# Altium PCB Vesa-Esp.PcbDoc
Units mm, origin at the board's own origin, x right, y up, seen from the top; angles counter-clockwise.
Board outline 120.35 x 116.57 mm, 2 copper layers (Top Layer, Bottom Layer); 81 components, 70 nets, 292 pads, 286 vias.
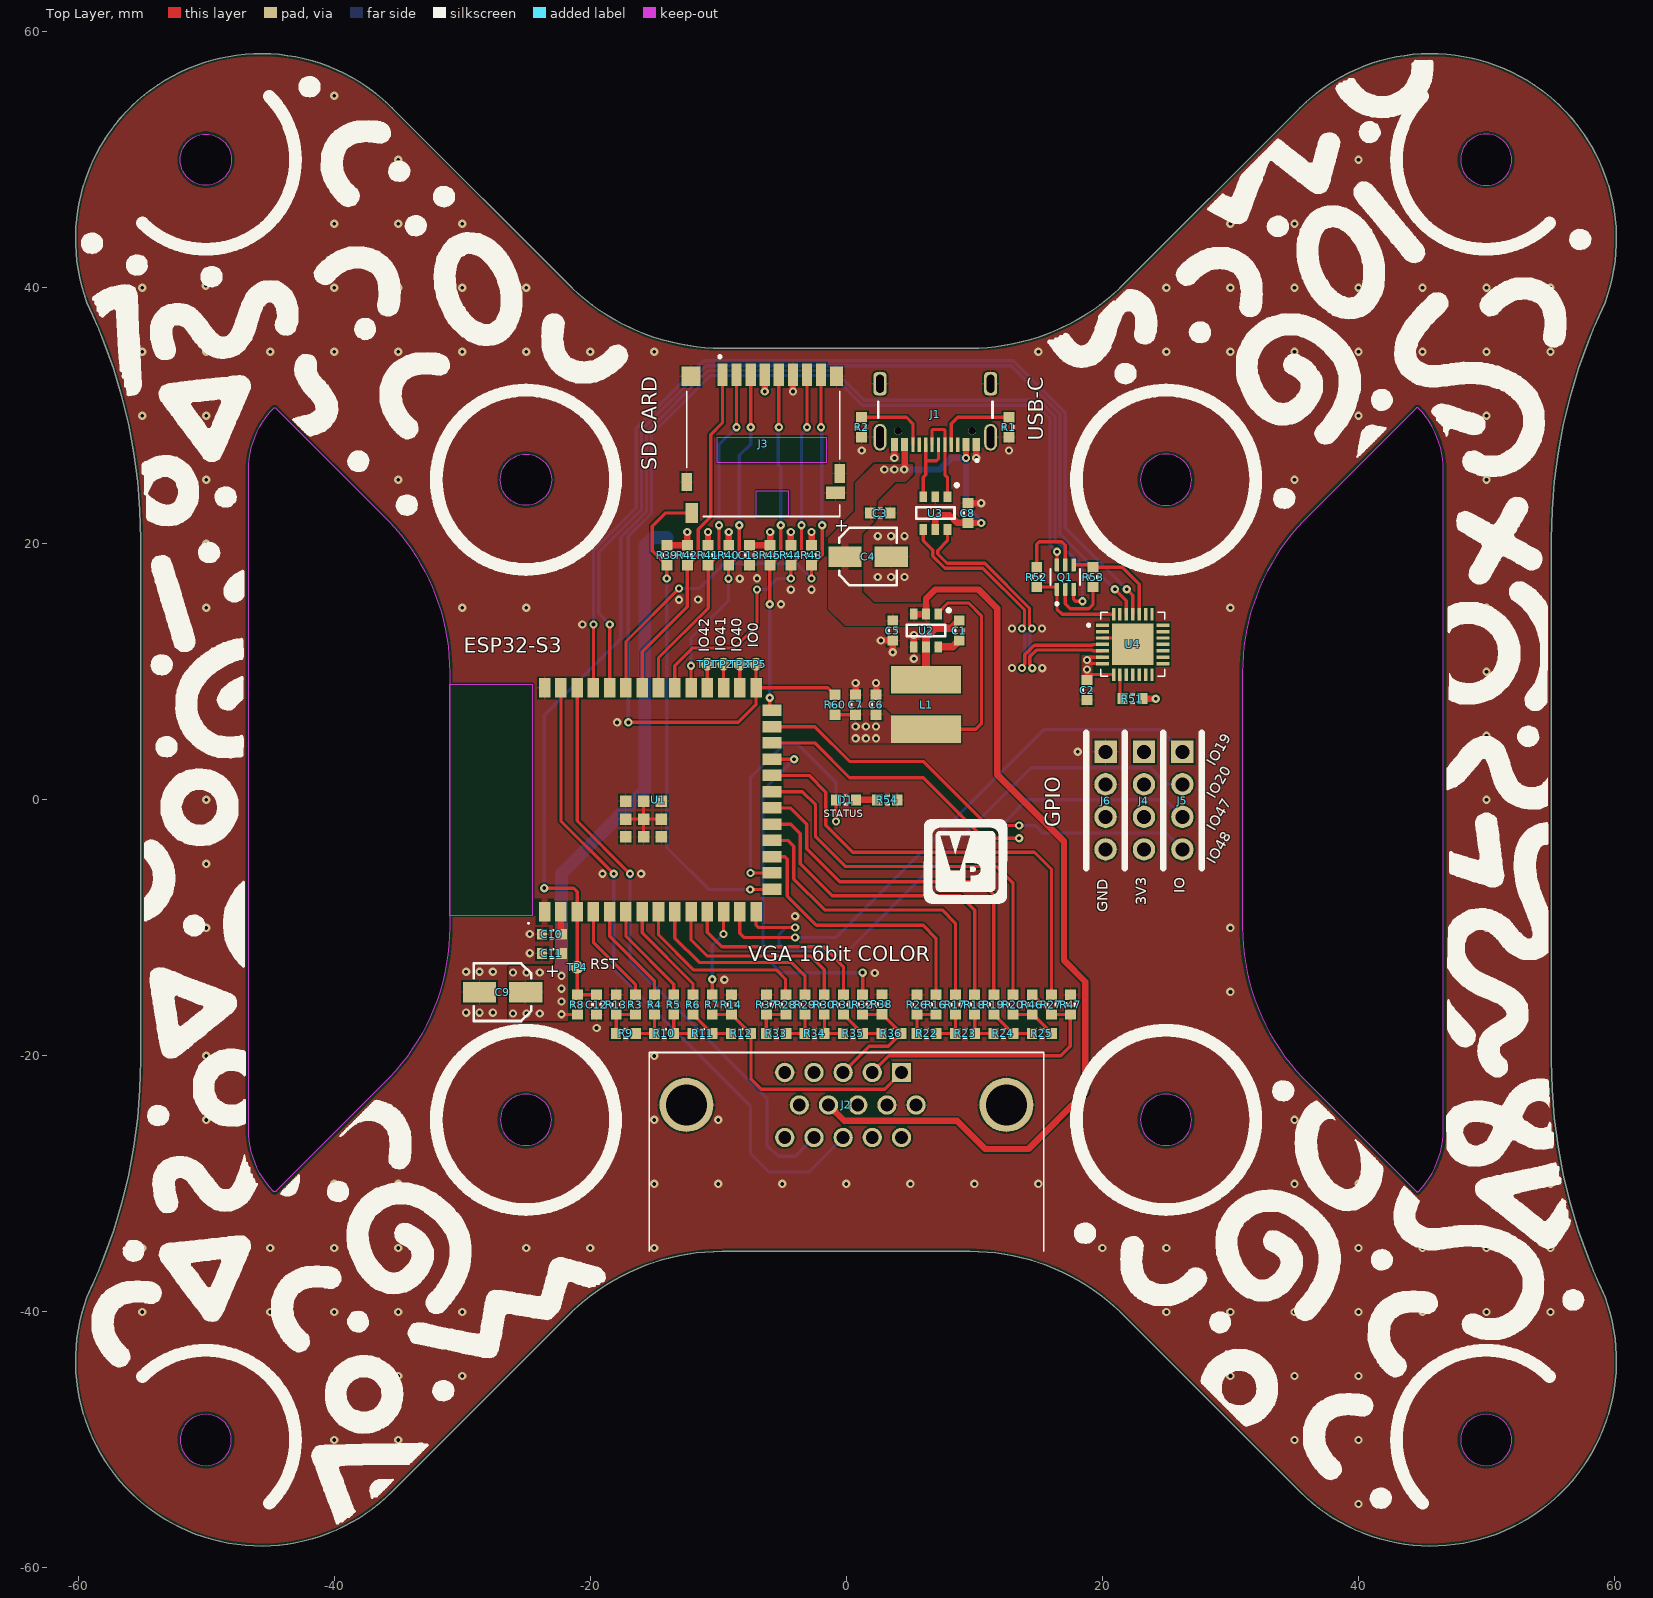
[diagram p0: Top Layer view]
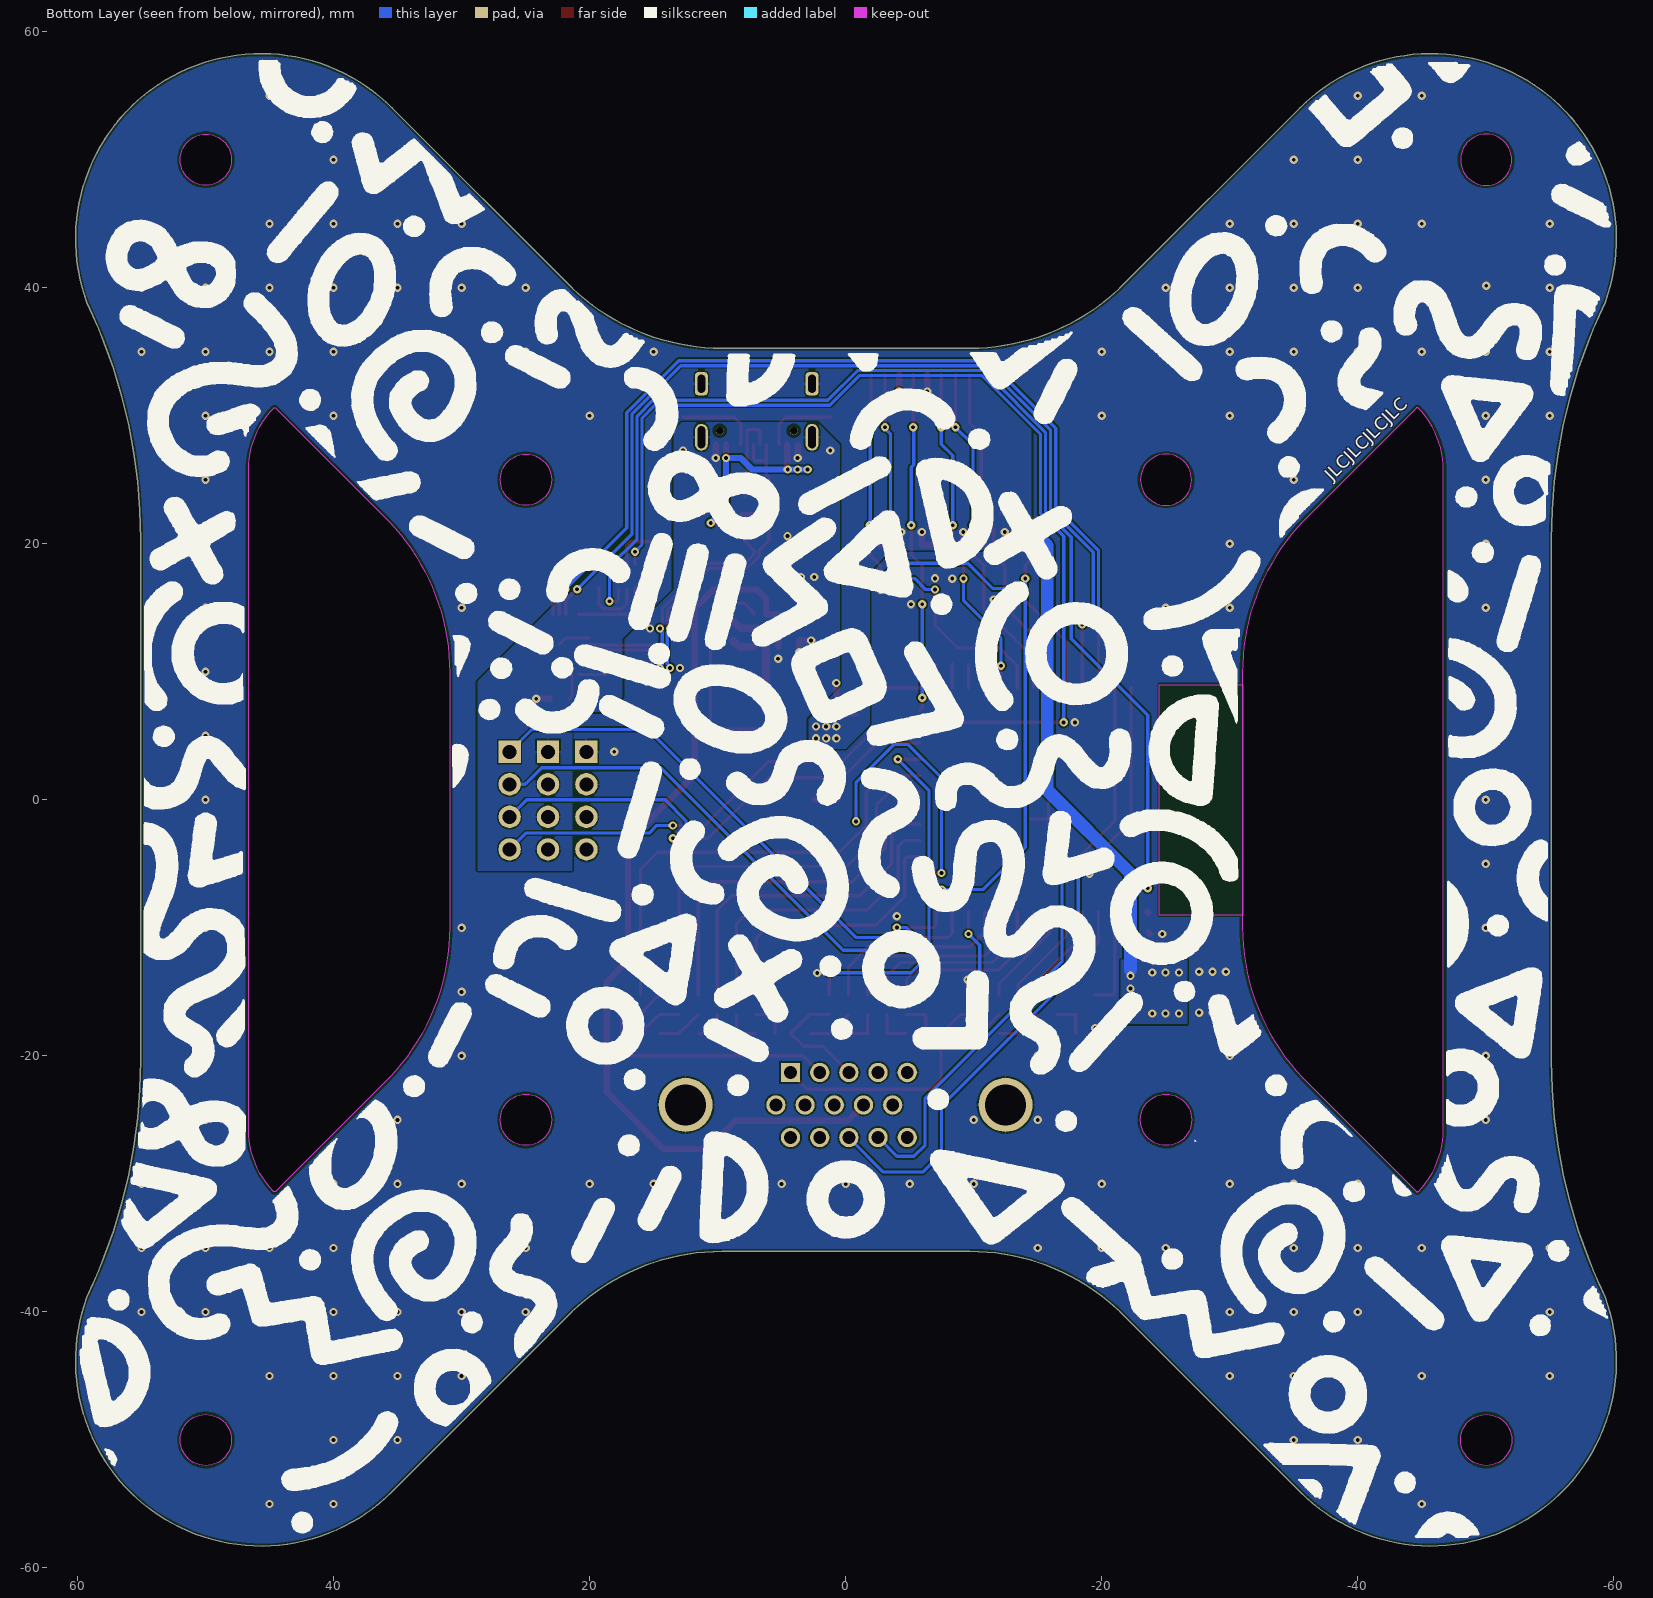
[diagram p1: Bottom Layer view, seen from below]

## Layer stack, top to bottom
Top Solder: solder mask 0.0102, Solder Resist, Dk 3.5
Top Layer: signal copper 0.0356
Dielectric 1: dielectric 0.32, FR-4, Dk 4.8
Bottom Layer: signal copper 0.0356
Bottom Solder: solder mask 0.0102, Solder Resist, Dk 3.5

## Board outline
-59.328,-38.855 ccw(c-97.864,-20.365) -55.122,-20.365 -55.122,20.365 ccw(c-97.864,20.365) -59.328,38.855 cw(c-45.722,43.807) -35.484,54.045 -21.415,39.975 ccw(c-9.694,52.229) -9.694,35.272 9.644,35.272 ccw(c9.644,52.229) 21.365,39.975 35.434,54.045 cw(c45.672,43.807) 59.278,38.855 ccw(c97.814,20.365) 55.072,20.365 55.072,-20.365 ccw(c97.814,-20.365) 59.278,-38.855 cw(c45.672,-43.807) 35.434,-54.045 21.365,-39.975 ccw(c9.644,-52.229) 9.644,-35.272 -9.694,-35.272 ccw(c-9.694,-52.229) -21.415,-39.975 -35.484,-54.045 cw(c-45.722,-43.807)
cut-out: 44.692,-30.588 ccw(c44.183,-30.099) 44.694,-30.586 ccw(c39.623,-25.739) 46.638,-25.739 46.638,25.739 ccw(c39.623,25.739) 44.692,30.588 ccw(c44.6,30.5) 44.501,30.58 35.678,21.757 ccw(c35.759,21.674) 35.675,21.754 ccw(c48.076,9.923) 30.937,9.923 30.937,-9.929 ccw(c31.06,-9.929) 30.937,-9.936 ccw(c48.076,-9.907) 35.647,-21.709 ccw(c35.767,-21.666) 35.678,-21.757 44.501,-30.58 ccw(c44.6,-30.5) 44.691,-30.589 ccw(c44.61,-30.51)
cut-out: -44.742,-30.588 cw(c-44.233,-30.099) -44.744,-30.586 cw(c-39.673,-25.739) -46.688,-25.739 -46.687,25.739 cw(c-39.673,25.739) -44.742,30.588 cw(c-44.65,30.5) -44.551,30.58 -35.727,21.757 cw(c-35.809,21.674) -35.725,21.754 cw(c-48.126,9.923) -30.987,9.923 -30.987,-9.929 cw(c-31.11,-9.929) -30.987,-9.936 cw(c-48.126,-9.907) -35.697,-21.709 cw(c-35.817,-21.666) -35.728,-21.757 -44.551,-30.58 cw(c-44.65,-30.5) -44.741,-30.589 cw(c-44.66,-30.51)
cut-out: -50.025,48 cw(c-50.025,50) -52.025,50 cw(c-50.025,50) -50.025,52 cw(c-50.025,50) -48.025,50 cw(c-50.025,50)
cut-out: -25.025,23 cw(c-25.025,25) -27.025,25 cw(c-25.025,25) -25.025,27 cw(c-25.025,25) -23.025,25 cw(c-25.025,25)
cut-out: 47.975,50 ccw(c49.975,50) 49.975,48 ccw(c49.975,50) 51.975,50 ccw(c49.975,50) 49.975,52 ccw(c49.975,50)
cut-out: 22.975,25 ccw(c24.975,25) 24.975,23 ccw(c24.975,25) 26.975,25 ccw(c24.975,25) 24.975,27 ccw(c24.975,25)
cut-out: 47.975,-50 ccw(c49.975,-50) 49.975,-52 ccw(c49.975,-50) 51.975,-50 ccw(c49.975,-50) 49.975,-48 ccw(c49.975,-50)
cut-out: 22.975,-25 ccw(c24.975,-25) 24.975,-27 ccw(c24.975,-25) 26.975,-25 ccw(c24.975,-25) 24.975,-23 ccw(c24.975,-25)
cut-out: -27.025,-25 ccw(c-25.025,-25) -25.025,-27 ccw(c-25.025,-25) -23.025,-25 ccw(c-25.025,-25) -25.025,-23 ccw(c-25.025,-25)
cut-out: -52.025,-50 ccw(c-50.025,-50) -50.025,-52 ccw(c-50.025,-50) -48.025,-50 ccw(c-50.025,-50) -50.025,-48 ccw(c-50.025,-50)

## Design rules (kind name [scope] priority, off if disabled: settings)
BoardOutlineClearance [All] p1: gap=0.2 ignorepadtopadclearanceinfootprint=FALSE
Clearance [All] p1: gap=0.127 ignorepadtopadclearanceinfootprint=TRUE except(0.254: Arc-Hole Track-Hole SMDPad-Hole THPad-Hole Via-Hole Fill-Hole Poly-Hole Region-Hole Text-Hole)
ComponentClearance [All] p1: gap=0.127 collisioncheckmode=3 verticalgap=0.127 showdistances=TRUE
DiffPairsRouting [All] p1: maxlimit=0.254 minlimit=0.127 mostfreqgap=0.127 toplayer_minwidth=0.127 toplayer_maxwidth=25.4 toplayer_prefwidth=0.127 bottomlayer_minwidth=0.127 bottomlayer_maxwidth=25.4 bottomlayer_prefwidth=0.127 maxuncoupledlength=12.7
Height [All] p1: minheight=0 maxheight=1816.048 prefheight=12.7
HoleSize [All] p1: absolutevalues=TRUE maxlimit=6.3 minlimit=0.3 maxpercent=80.000 minpercent=20.000
HoleToHoleClearance [All] p1: gap=0.254 allowstackedmicrovias=FALSE
MinimumAnnularRing [All] p1: minimumring=0.152
MinimumSolderMaskSliver [All] p1: minsoldermaskwidth=0.152
PlaneClearance [All] p1: clearance=0.127
PlaneConnect PlaneConnectPowerPads [InPadClass('PowerPads')] p1: planeconnectstyle=Direct reliefexpansion=0.508 reliefentries=4 reliefconductorwidth=0.254 reliefairgap=0.254
PlaneConnect [All] p2: planeconnectstyle=Relief reliefexpansion=0.3 reliefentries=4 reliefconductorwidth=0.508 reliefairgap=0.254
PolygonConnect PolygonConnectPowerPads [All vs (InPadClass('PowerPads'))] p1: connectstyle=Direct reliefconductorwidth=0.254 reliefentries=4 polygonreliefangle="90 Angle" airgapwidth=0.254
PolygonConnect [All] p2: thpad.connectstyle=Relief thpad.reliefconductorwidth=0.127 thpad.reliefentries=4 thpad.polygonreliefangle="90 Angle" thpad.airgapwidth=0.127 smdpad.connectstyle=Relief smdpad.reliefconductorwidth=0.127 smdpad.reliefentries=4 smdpad.polygonreliefangle="90 Angle" smdpad.airgapwidth=0.127 via.connectstyle=Direct via.reliefconductorwidth=0.127 via.reliefentries=4 via.polygonreliefangle="90 Angle" via.airgapwidth=0.127
RoutingVias [All] p1: holewidth=0.3 width=0.6 viastyle="Through Hole" minholewidth=0.3 minwidth=0.6 maxholewidth=0.6 maxwidth=6.6
SilkToSilkClearance [All] p1: silktosilkclearance=0.127
SilkToSolderMaskClearance [IsPad] p1: minsilkscreentomaskgap=0.127 clearancetoexposedcopper=TRUE
SolderMaskExpansion [All] p1: expansion=0.051 istentingtop=FALSE
UnRoutedNet [All] p1: checkbadconnections=TRUE
Width Width_10mil [All] p1: maxlimit=25.4 minlimit=0.254 preferedwidth=0.254 minimp=50.000000 maximp=50.000000 favimp=50.000000
Width Width_6mil [All] p2: maxlimit=25.4 minlimit=0.152 preferedwidth=0.152 minimp=50.000000 maximp=50.000000 favimp=50.000000
Width Power_20mil [All] p3: maxlimit=25.4 minlimit=0.508 preferedwidth=0.508 minimp=50.000000 maximp=50.000000 favimp=50.000000
Width Power_12mil [All] p4: maxlimit=25.4 minlimit=0.305 preferedwidth=0.305 minimp=50.000000 maximp=50.000000 favimp=50.000000
Width Width_5mil [All] p5: maxlimit=25.4 minlimit=0.127 preferedwidth=0.127 minimp=50.000000 maximp=50.000000 favimp=50.000000
19 further rules are at their usual default settings.

## Classes and differential pairs
net class SD: SD_CLK SD_CMD SD_DAT0 SD_DAT1 SD_DAT2 SD_DAT3
differential pair USB_D: +USB_D_P -USB_D_N
differential pair ESP_USB_D: +ESP_USB_D_P -ESP_USB_D_N

## Components (designator, comment, footprint, x,y, rotation, side; value= is the part's Value field where it differs from the comment)
C1 "100nF 50V" CAPC1608X06N 8.825,13.225 r270 top
C2 "22uF 6V3" CAPC1608X06N 18.8,8.575 r90 top
C3 "100nF 50V" CAPC1608X06N 2.65,22.4 r180 top
C4 "47uF 20V" 865080342006 1.7,19 r180 top
C5 "22uF 6V3" CAPC1608X06N 3.625,13.225 r90 top
C6 "22uF 6V3" CAPC1608X06N 2.325,7.425 r270 top
C7 "22uF 6V3" CAPC1608X06N 0.725,7.425 r270 top
C8 "100nF 50V" CAPC1608X06N 9.5,22.4 r270 top
C9 "47uF 20V" 865080342006 -26.85,-15.025 r0 top
C10 "22uF 6V3" CAPC1608X06N -23,-10.5 r0 top
C11 "100nF 50V" CAPC1608X06N -23,-12 r0 top
C12 "100nF 50V" CAPC1608X06N -19.5,-16 r90 top
C13 "100nF 50V" CAPC1608X06N -7.566,19.1 r90 top
D1 "QBLP601-IW" LEDC1608X06N -0.025,0 r0 top
J1 "USB4105-GF-A" USB4105-GF-A 6.95,32.5 r180 top
J2 "ICD15S13E4GX00LF" ICD15S13E4GX00LF 0.005,-23.835 r0 top
J3 "DM3D-SF" DM3D-SF -6.498,28.253 r180 top
J4 "Conn_2.54mm_4POS" CONN_2.54MM_4POS 23.25,3.75 r270 top
J5 "Conn_2.54mm_4POS" CONN_2.54MM_4POS 26.25,3.75 r270 top
J6 "Conn_2.54mm_4POS" CONN_2.54MM_4POS 20.25,3.75 r270 top
L1 "3.9uH/3.6A" SDE0604A-3R9M 6.225,7.425 r270 top
Q1 "BC847BS-7-F" SOT65P210X110-6N 17.1,17.4 r90 top
R1 "5K1 1%" RESC1608X06N 12.7,29.1 r90 top
R2 "5K1 1%" RESC1608X06N 1.2,29.1 r90 top
R3 "300R 1%" RESC1608X06N -16.475,-16 r270 top
R4 "300R 1%" RESC1608X06N -14.975,-16 r270 top
R5 "300R 1%" RESC1608X06N -13.475,-16 r270 top
R6 "300R 1%" RESC1608X06N -11.975,-16 r270 top
R7 "300R 1%" RESC1608X06N -10.475,-16 r270 top
R8 "10K 1%" RESC1608X06N -21,-16 r90 top
R9 "150R 1%" RESC1608X06N -17.225,-18.25 r0 top
R10 "150R 1%" RESC1608X06N -14.225,-18.25 r0 top
R11 "150R 1%" RESC1608X06N -11.225,-18.25 r0 top
R12 "150R 1%" RESC1608X06N -8.225,-18.25 r0 top
R13 "300R 1%" RESC1608X06N -17.975,-16 r270 top
R14 "150R 1%" RESC1608X06N -8.975,-16 r90 top
R16 "300R 1%" RESC1608X06N 7,-16 r270 top
R17 "300R 1%" RESC1608X06N 8.525,-16 r270 top
R18 "300R 1%" RESC1608X06N 10.025,-16 r270 top
R19 "300R 1%" RESC1608X06N 11.525,-16 r270 top
R20 "300R 1%" RESC1608X06N 13.025,-16 r270 top
R22 "150R 1%" RESC1608X06N 6.275,-18.25 r0 top
R23 "150R 1%" RESC1608X06N 9.275,-18.25 r0 top
R24 "150R 1%" RESC1608X06N 12.275,-18.25 r0 top
R25 "150R 1%" RESC1608X06N 15.275,-18.25 r0 top
R26 "300R 1%" RESC1608X06N 5.525,-16 r270 top
R27 "300R 1%" RESC1608X06N 16.025,-16 r270 top
R28 "300R 1%" RESC1608X06N -4.725,-16 r270 top
R29 "300R 1%" RESC1608X06N -3.225,-16 r270 top
R30 "300R 1%" RESC1608X06N -1.725,-16 r270 top
R31 "300R 1%" RESC1608X06N -0.225,-16 r270 top
R32 "300R 1%" RESC1608X06N 1.275,-16 r270 top
R33 "150R 1%" RESC1608X06N -5.475,-18.25 r0 top
R34 "150R 1%" RESC1608X06N -2.475,-18.25 r0 top
R35 "150R 1%" RESC1608X06N 0.525,-18.25 r0 top
R36 "150R 1%" RESC1608X06N 3.525,-18.25 r0 top
R37 "300R 1%" RESC1608X06N -6.225,-16 r270 top
R38 "150R 1%" RESC1608X06N 2.775,-15.975 r90 top
R39 "10K 1%" RESC1608X06N -14,19.1 r270 top
R40 "10K 1%" RESC1608X06N -9.184,19.1 r270 top
R41 "10K 1%" RESC1608X06N -10.802,19.1 r270 top
R42 "10K 1%" RESC1608X06N -12.419,19.1 r270 top
R43 "10K 1%" RESC1608X06N -2.713,19.1 r270 top
R44 "10K 1%" RESC1608X06N -4.331,19.1 r270 top
R45 "10K 1%" RESC1608X06N -5.949,19.1 r270 top
R46 "150R 1%" RESC1608X06N 14.525,-16 r90 top
R47 "300R 1%" RESC1608X06N 17.525,-16 r270 top
R51 "10K 1%" RESC1608X06N 22.35,7.9 r180 top
R52 "10K 1%" RESC1608X06N 14.875,17.4 r270 top
R53 "10K 1%" RESC1608X06N 19.275,17.4 r90 top
R54 "300R 1%" RESC1608X06N 3.2,0 r180 top
R60 "10K 1%" RESC1608X06N -0.875,7.425 r90 top
TP1 "TP" TESTPOINT -10.865,10.6 r270 top
TP2 "TP" TESTPOINT -9.595,10.6 r270 top
TP3 "TP" TESTPOINT -8.325,10.6 r270 top
TP4 "TP" TESTPOINT -21.025,-13.075 r90 top
TP5 "TP" TESTPOINT -7.05,10.6 r90 top
U1 "ESP32-S3-WROOM-1-N16R8" ESP32-S3-WROOM -18.3,0 r90 top
U2 "AP63203WU-7" SOT95P245X100-6N 6.225,13.225 r270 top
U3 "USBLC6-2SC6" SOT95P245X100-6N 6.95,22.4 r270 top
U4 "CP2102N-A02-GQFN28" QFN50P500X500X80-29N 22.375,12.14 r0 top

## Footprints (in the part's own frame and the unit in brackets; to place one, negate y for a bottom-side part, rotate by r counter-clockwise, add the part's x,y. Pads: shape width x height; smd on the part's side, far side on the other; paste and mask are expansions set on the pad)
865080342006 [mm]
  rect 2.6x1.6 smd: 1(1.8,0) 2(-1.8,0)
  silkscreen extent -2.25,-2.25 2.25,2.25, body extent -2.5,-2.15 2.5,2.15, height 5.5
CAPC1608X06N [mm] "Chip Capacitor, 2-Leads, Body 1.60x0.80mm, IPC Medium Density"
  rect 0.8x0.85 smd: 1(-0.775,0) 2(0.775,0)
  silkscreen extent -0.1,-0.33 0.1,0.33, body extent -0.8,-0.4 0.8,0.4, height 0.6
CONN_2.54MM_4POS [mm]
  rect 1.75x1.75 hole 1.1: 1(0,0)
  round 1.75 hole 1.1: 2(2.54,0) 3(5.08,0) 4(7.62,0)
  silkscreen extent -1.5,-1.5 9.1,-1.5
DM3D-SF [mm]
  rect 0.8x1.75 smd: 1(3.173,-4.953) 2(2.073,-4.953) 3(0.973,-4.953) 4(-0.127,-4.953) 5(-1.227,-4.953) 6(-2.327,-4.953) 7(-3.427,-4.953) 8(-4.527,-4.953)
  rect 1x1.5 smd: S1(-5.727,-4.828)
  rect 1.5x1.5 smd: S2(5.623,-4.828)
  rect 0.8x1.5 smd: S3(-5.977,2.772)
  rect 0.8x1.4 smd: S4(5.973,3.422)
  rect 1x1.55 smd: SW-A(5.573,5.847)
  rect 1.45x1 smd mask+0.03: SW-B(-5.652,4.272)
  Top Layer keep-out region: 3.573,-0.078 -4.927,-0.078 -4.927,1.922 3.573,1.922
  Top Layer keep-out region: 0.523,4.122 -1.977,4.122 -1.977,6.122 0.523,6.122
  silkscreen extent -5.98,-6.45 5.97,6.12, body extent -5.97,-5.34 5.97,6.11, height 1.56
ESP32-S3-WROOM [mm]
  rect 1.5x0.9 smd: 1(-8.75,5.26) 2(-8.75,3.99) 3(-8.75,2.72) 4(-8.75,1.45) 5(-8.75,0.18) 6(-8.75,-1.09) 7(-8.75,-2.36) 8(-8.75,-3.63) 9(-8.75,-4.9) 10(-8.75,-6.17) 11(-8.75,-7.44) 12(-8.75,-8.71) 13(-8.75,-9.98) 14(-8.75,-11.25) 27(8.75,-11.25) 28(8.75,-9.98) 29(8.75,-8.71) 30(8.75,-7.44) 31(8.75,-6.17) 32(8.75,-4.9) 33(8.75,-3.63) 34(8.75,-2.36) 35(8.75,-1.09) 36(8.75,0.18) 37(8.75,1.45) 38(8.75,2.72) 39(8.75,3.99) 40(8.75,5.26)
  rect 0.9x1.5 smd: 15(-6.985,-12.5) 16(-5.715,-12.5) 17(-4.445,-12.5) 18(-3.175,-12.5) 19(-1.905,-12.5) 20(-0.635,-12.5) 21(0.635,-12.5) 22(1.905,-12.5) 23(3.175,-12.5) 24(4.445,-12.5) 25(5.715,-12.5) 26(6.985,-12.5)
  rect 0.9x0.9 smd: 41(-2.9,-2.46) 41(-2.9,-1.06) 41(-2.9,-3.86) 41(-1.5,-1.06) 41(-1.5,-3.86) 41(-1.5,-2.46) 41(-0.1,-1.06) 41(-0.1,-2.46) 41(-0.1,-3.86)
  silkscreen extent -9.7,6.48 -9.6,6.57, body extent -9,-12.75 9,12.75, height 3.25
ICD15S13E4GX00LF [mm]
  rect 1.508x1.508 hole 1: 1(4.305,2.54)
  round 1.508 hole 1: 2(2.025,2.54) 3(-0.255,2.54) 4(-2.535,2.54) 5(-4.815,2.54) 6(5.445,0) 7(3.165,0) 8(0.885,0) 9(-1.395,0) 10(-3.675,0) 11(4.305,-2.54) 12(2.025,-2.54) 13(-0.255,-2.54) 14(-2.535,-2.54) 15(-4.815,-2.54)
  round 4.216 hole 3.2: S1(-12.495,0) S2(12.495,0)
  silkscreen extent -15.41,-11.43 15.41,4.1, body extent -15.51,-17.53 15.5,4.05, height 12.55
LEDC1608X06N [mm] "Chip LED, 2-Leads, Body 1.60x0.80mm, IPC Medium Density"
  rect 0.8x0.85 smd: 1(-0.775,0) 2(0.775,0)
  silkscreen extent -0.1,-0.33 0.1,0.33, body extent -0.8,-0.4 0.8,0.4, height 0.6
QFN50P500X500X80-29N [mm]
  rect 0.99x0.27 smd mask+0.035: 1(-2.36,1.5) 2(-2.36,1) 3(-2.36,0.5) 4(-2.36,0) 5(-2.36,-0.5) 6(-2.36,-1) 7(-2.36,-1.5) 15(2.36,-1.5) 16(2.36,-1) 17(2.36,-0.5) 18(2.36,0) 19(2.36,0.5) 20(2.36,1) 21(2.36,1.5)
  rect 0.27x0.99 smd mask+0.035: 8(-1.5,-2.36) 9(-1,-2.36) 10(-0.5,-2.36) 11(0,-2.36) 12(0.5,-2.36) 13(1,-2.36) 14(1.5,-2.36) 22(1.5,2.36) 23(1,2.36) 24(0.5,2.36) 25(0,2.36) 26(-0.5,2.36) 27(-1,2.36) 28(-1.5,2.36)
  rect 3.25x3.25 smd paste-0.597 mask+0.04: 29(0,0)
  silkscreen extent -3.55,-2.5 2.5,2.5, body extent -2.5,-2.5 2.5,2.5, height 0.81
RESC1608X06N [mm] "Chip Resistor, 2-Leads, Body 1.60x0.80mm, IPC Medium Density"
  rect 0.8x0.85 smd: 1(-0.775,0) 2(0.775,0)
  silkscreen extent -0.1,-0.33 0.1,0.33, body extent -0.8,-0.4 0.8,0.4, height 0.6
SDE0604A-3R9M [mm]
  rect 2.15x5.5 smd: 1(-1.945,0) 2(1.905,0)
  body extent -2.8,-2.61 2.78,2.59, height 4.52
SOT65P210X110-6N [mm]
  rrect25% 1.02x0.36 smd: 1(-0.955,0.65) 2(-0.955,0) 3(-0.955,-0.65) 4(0.955,-0.65) 5(0.955,0) 6(0.955,0.65)
  silkscreen extent -2.18,-1.15 0.63,1.15, body extent -1.05,-1 1.05,1, height 1.1
SOT95P245X100-6N [mm] "SOT23, 6-Leads, Body 2.90x2.45mm, Pitch 0.95mm, IPC Medium Density"
  rect 0.85x0.6 smd: 1(-1.275,0.95) 2(-1.275,0) 3(-1.275,-0.95) 4(1.275,-0.95) 5(1.275,0) 6(1.275,0.95)
  silkscreen extent -1.7,-1.5 0.45,1.9, body extent -1.45,-1.45 1.45,1.45, height 1
TESTPOINT [mm] "TESTPOINT"
  round 1 smd: 1(0,0)
USB4105-GF-A [mm]
  rect 0.55x1 smd mask+0.03: A1_B12(-3.2,4.755) A4_B9(-2.4,4.755) B1_A12(3.2,4.755) B4_A9(2.4,4.755)
  rect 0.25x1.15 smd mask+0.03: A5(-1.25,4.755) A6(-0.25,4.755) A7(0.25,4.755) A8(1.25,4.755) B5(1.75,4.755) B6(0.75,4.755) B7(-0.75,4.755) B8(-1.75,4.755)
  oval 1x2.1 hole 0.6 slot 1.7 at 90 deg: SH1(-4.32,4.18) SH2(4.32,4.18)
  rrect50% 1x1.8 hole 0.6 slot 1.4 at 90 deg: SH3(-4.32,0) SH4(4.32,0)
  round 0.6 hole 0.6 unplated mask+0.04: ""(-2.89,3.68) ""(2.89,3.68)
  silkscreen extent -4.47,1.4 4.47,6.1, body extent -4.47,-2.6 4.47,5.11, height 3.31

## Part data
C1 C3 C8 C11 C12 C13: "0.1 µF ±10% 50V Ceramic Capacitor X7R 0603 (1608 Metric)", MPN=GCM188R71H104KA57D
C2 C5 C6 C7 C10: "22 µF ±20% 6.3V Ceramic Capacitor X5R 0603 (1608 Metric)", MPN=GRM188R60J226MEA0D
C4: "47 µF 16 V Aluminum Electrolytic Capacitors Radial, Can - SMD 2000 Hrs @ 105°C", Manufacturer Part Number 1=865080342006
C9: "47 µF 16 V Aluminum Electrolytic Capacitors Radial, Can - SMD 2000 Hrs @ 105°C", MPN=865080342006
D1: library part "LED WHITE", "White LED Indication - Discrete 3.2V 0603 (1608 Metric)", MPN=QBLP601-IW
J1: "USB-C (USB TYPE-C) USB 2.0 Receptacle Connector 24 (16+8 Dummy) Position Surface Mount, Right Angle; Through Hole", MPN=USB4105-GF-A
J2: "15 Position D-Sub, High Density Receptacle, Female Sockets Connector", MPN=ICD15S13E4GX00LF
J3: "10 (8 + 2) Position Card Connector Secure Digital - microSD™ Surface Mount, Right Angle Gold", MPN=DM3D-SF
J4 J5 J6: library part Conn_2.54mm_4POS_1
L1: "FIXED IND 3.9UH 3.6A 65 MOHM SMD", MPN=SDE0604A-3R9M
Q1: "Bipolar (BJT) Transistor Array 2 NPN (Dual) 45V 100mA 100MHz 200mW Surface Mount SOT-363", MPN=BC847BS-7-F
R1 R2: "5.1 kOhms ±1% 0.1W, 1/10W Chip Resistor 0603 (1608 Metric) Automotive AEC-Q200 Thick Film", MPN=ERJ-3EKF5101V
R3 R4 R5 R6 R7 R13 R16 R17 R18 R19 R20 R26 R27 R28 R29 R30 R31 R32 R37 R47 R54: "300 Ohms ±1% 0.1W, 1/10W Chip Resistor 0603 (1608 Metric) Automotive AEC-Q200 Thick Film", MPN=ERJ-3EKF3000V
R8 R39 R40 R41 R42 R43 R44 R45 R51 R52 R53 R60: "10 kOhms ±1% 0.1W, 1/10W Chip Resistor 0603 (1608 Metric) Automotive AEC-Q200 Thick Film", MPN=ERJ-3EKF1002V
R9 R10 R11 R12 R14 R22 R23 R24 R25 R33 R34 R35 R36 R38 R46: "150 Ohms ±1% 0.1W, 1/10W Chip Resistor 0603 (1608 Metric) Automotive AEC-Q200 Thick Film", MPN=ERJ-3EKF1500V
TP1 TP2 TP3 TP4 TP5: "Test Point"
U1: "Bluetooth, WiFi 802.11b/g/n, Bluetooth v5.0 Transceiver Module 2.4GHz PCB Trace Surface Mount", MPN=ESP32-S3-WROOM-1-N16R8
U2: "Buck Switching Regulator IC Positive Fixed 3.3V 1 Output 2A SOT-23-6 Thin, TSOT-23-6", MPN=AP63203WU-7
U3: "17V Clamp 5A (8/20µs) Ipp Tvs Diode Surface Mount SOT-23-6", MPN=USBLC6-2SC6
U4: "USB Bridge, USB to UART USB 2.0 UART Interface 28-QFN (5x5)", MPN=CP2102N-A02-GQFN28

## Via types
v1: diameter 0.65, hole 0.3, Top Layer to Bottom Layer, tented both sides, 286 vias

## Nets (pads, with @x,y where several pads share a name; then routed paths per layer and width w, separated by ;. In a path a pad name is that pad's centre, name@x,y a point inside that pad or via, vN(x,y) a via of type N, cw(c..) or ccw(c..) an arc to the next point about the centre after c; other vN are vias at no path point)
+3V3: C2.2 C6.2 C7.2 C9.1 C10.2 C11.2 C13.2 J3.4 J4.1 J4.2 J4.3 J4.4 L1.2 R8.1 R39.1 R40.1 R41.1 R42.1 R43.1 R44.1 R45.1 R51.1 R60.1 U1.2 U2.1 U4.6 U4.7 U4.8 | length 75.5
  Top Layer w0.254: v1@-22.25,-16.775 R8.1 ; R60.1 C7.2 ; L1.2 10.12,5.52 10.55,5.95 10.55,14.375 9.55,15.375 7.925,15.375 7.175,14.625 U2.1 ; 18.75,9.75 18.78,9.78 U4.8 ; 19.04,10.64 U4.7 ; v1@19.04,11.14 U4.6
  Top Layer w0.5: R39.1 R42.1 v1(-12.419,20.92) ; R41.1 v1(-10.802,20.92) ; R40.1 v1(-9.184,20.92) ; C13.2 R45.1 v1(-5.949,20.92) ; J3.4 J3.4 v1@-6.371,31.891 ; R44.1 v1(-4.331,20.92) ; R43.1 v1(-2.713,20.92) ; R51.1 v1(24.17,7.9)
  Top Layer w0.508: U1.2 -22.29,-10.435 C10.2
  Bottom Layer w1: -22.25,-13.25 -22.25,-5.75 -15.75,0.75 -15.75,19.85 -15.1,20.5 -14,20.5
  other v1: -22.25,-16.75 -26.031,-16.684 -24.986,-16.683 -23.941,-16.683 -22.25,-15.75 -22.25,-14.75 -22.25,-13.75 -26.032,-13.494 -24.987,-13.493 -23.942,-13.493 0.725,4.8 1.525,4.8 2.325,4.8 0.725,5.725 1.525,5.725 2.325,5.725 18.8,10.175 18.8,10.925 -6.369,31.889
+5V: C3.2 C4.1 C5.2 C8.2 J1.A4_B9 J1.B4_A9 J2.9 U2.2 U2.3 U3.5 | length 92.7
  Top Layer w0.5: J2.9 -0.15,-25.075 8.65,-25.075 10.85,-27.275 14.225,-27.275 18.675,-22.825 18.675,-14.2 17,-12.525 17,-3.25 11.775,1.975 11.775,3.4 11.775,14.975 10.325,16.425 6.95,16.425 6.225,15.7 U2.2 U2.3 ; v1(4.525,25.8) 4.55,25.825 4.55,26.7 J1.B4_A9 ; U3.5 6.95,21.932 7.243,22.225 8.075,22.225 8.645,21.655 9.47,21.655 C8.2 ; v1(9.35,26.7) J1.A4_B9 ; C8.2@9.475,21.625 C8.2 ; v1(10.545,21.625) C8.2
  Bottom Layer w0.5: v1(2.975,25.8) v1(4.525,25.8) 7.3,25.8 8.2,26.7 v1(9.35,26.7) 9.35,22.82 v1(10.545,21.625)
  other v1: 3.75,25.8
DTR: Q1.1 R52.2 U4.28 | length 7.9
  Top Layer w0.254: R52.2 16.397,16.625 16.45,16.572 Q1.1 16.45,14.9 16.85,14.5 U4.28
ESP_EN: C12.2 Q1.3 R8.2 TP4.1 U1.3 | length 103.5
  Top Layer w0.254: v1(-23.6,-6.9) -21.3,-6.9 -21.02,-7.18 U1.3 -21.02,-15.205 R8.2 C12.2 ; Q1.3 17.75,15.653 17.899,15.504 v1(18.45,15.504)
  Bottom Layer w0.254: v1(-23.6,-6.9) -23.6,6.6 -17.625,12.575 -17.625,20.514 -15.6,22.539 -15.6,28.7 -13.35,30.95 -13.35,30.983 -10.801,33.532 -0.932,33.532 1.394,31.206 15.058,31.206 16.292,29.972 16.292,20.352 18.45,18.194 v1(18.45,15.504)
ESP_RXD0: U1.36 U4.26 | length 76
  Top Layer w0.254: U1.36 -18.475,8.755 v1(-18.475,13.7) ; v1(20.975,16.45) 21.867,15.558 21.867,14.508 U4.26
  Bottom Layer w0.254: v1(-18.475,13.7) -19.346,14.571 -19.346,19.332 -16.004,22.674 -16.004,28.867 -10.958,33.913 12.89,33.913 16.696,30.107 16.696,20.729 v1(20.975,16.45)
ESP_TXD0: U1.37 U4.25 | length 77
  Top Layer w0.254: U1.37 -19.745,8.755 v1(-19.745,13.7) ; v1(21.9,16.45) 22.375,15.975 U4.25
  Bottom Layer w0.254: v1(-19.745,13.7) -19.75,13.705 -19.75,19.466 -16.408,22.808 -16.408,29.035 -11.149,34.294 13.049,34.294 17.1,30.243 17.1,21.25 v1(21.9,16.45)
ESP_USB_D_N: U3.6 U4.5 | length 23
  Top Layer w0.254: U3.6 7.9,20.225 7.141,19.466 7.141,19.2 7.866,18.475 10.814,18.475 14.304,14.985 14.304,13.68 14.502,13.482 v1(14.502,13.375) ; v1(14.524,10.284) 14.524,10.391 14.327,10.588 14.327,11.177 14.849,11.699 19.206,11.699 19.265,11.64 U4.5
  Bottom Layer w0.254: v1(14.502,13.375) 14.502,13.268 14.327,13.093 14.327,10.588 14.524,10.391 v1(14.524,10.284)
ESP_USB_D_P: U3.4 U4.4 | length 23.6
  Top Layer w0.254: U3.4 6,20.25 6.76,19.491 6.76,19.042 7.708,18.094 10.656,18.094 13.923,14.827 13.923,13.68 13.725,13.482 v1(13.725,13.375) ; v1(13.725,10.3) 13.725,10.407 13.946,10.628 13.946,11.335 14.692,12.08 19.22,12.08 19.279,12.14 U4.4
  Bottom Layer w0.254: v1(13.725,10.3) 13.725,10.407 13.946,10.628 13.946,13.047 13.725,13.268 v1(13.725,13.375)
GND: C2.1 C3.1 C4.2 C5.1 C6.1 C7.1 C8.1 C9.2 C10.1 C11.1 C12.1 C13.1 J1.A1_B12 J1.B1_A12 J1.SH1 J1.SH2 J1.SH3 J1.SH4 J2.5 J2.6 J2.7 J2.8 J2.10 J2.S1 J2.S2 J3.6 J3.S1 J3.S2 J3.S3 J3.S4 J3.SW-B J6.1 J6.2 J6.3 J6.4 R1.1 R2.1 R13.1 R14.2 R26.1 R37.1 R38.2 R47.1 R54.1 U1.1 U1.40 U1.41 U2.4 U3.2 U4.3 U4.29 | length 17.5
  Top Layer w0.254: U1.41@-17.24,-1.5 U1.41@-15.84,-1.5 ; U1.41@-15.84,-2.9 U1.41@-15.84,-1.5 ; U1.41@-15.84,-0.1 U1.41@-15.84,-1.5 ; U1.41@-14.44,-1.5 U1.41@-15.84,-1.5 ; U4.3 21.875,12.64 U4.29
  Top Layer w0.5: C10.1 C10.1@-23.625,-10.35 ; U1.1@-23.625,-8.815 U1.1 ; v1@-4.171,31.891 J3.6 ; C7.1 v1(0.725,9.125) ; C6.1 v1(2.325,9.125) ; v1(2.7,12.45) C5.1 v1(3.625,11.525) ; v1(3.75,26.7) J1.B1_A12 ; U2.4 v1(5.275,12.875) ; C8.1 v1(10.545,23.175) ; v1(10.15,26.7) J1.A1_B12
  other v1: -45,-55 -40,-55 40,-55 45,-55 -40,-50 -35,-50 35,-50 40,-50 -55,-45 -45,-45 -40,-45 -35,-45 -30,-45 30,-45 35,-45 40,-45 45,-45 55,-45 -55,-40 -50,-40 -45,-40 -40,-40 -35,-40 -30,-40 -25,-40 25,-40 30,-40 35,-40 40,-40 45,-40 50,-40 55,-40 -55,-35 -50,-35 -45,-35 -40,-35 -35,-35 -30,-35 -25,-35 -20,-35 -15,-35 20,-35 25,-35 30,-35 35,-35 40,-35 45,-35 50,-35 55,-35 50.166,-30.714 -50,-30 -40,-30 -35,-30 -30,-30 -20,-30 -15,-30 -10,-30 -5,-30 0,-30 5,-30 10,-30 15,-30 20,-30 30,-30 35,-30 40,-30 55,-30 -50,-25 -35,-25 -15,-25 -10,-25 35,-25 50,-25 -50,-20 -30,-20 -15,-20 30,-20 50,-20 -19.5,-17.82 -29.695,-16.62 -28.65,-16.62 -27.605,-16.62 -50,-15 30,-15 50,-15 -9.525,-14.05 2.225,-13.525 -29.695,-13.43 -28.65,-13.43 -27.605,-13.43 -24.725,-11.975 -24.725,-10.475 -50,-10 30,-10 50,-10 -4,-9.098 -19.045,-5.775 -16.025,-5.775 -50,-5 50,-5 -50,0 50,0 18.075,3.75 -50,5 50,5 -17.9,6.05 -50,10 50,10 15.301,10.284 12.948,10.3 5.275,11.025 12.948,13.375 15.279,13.375 -20.62,13.7 -50,15 -30,15 -25,15 30,15 50,15 -5.1,15.275 -13.075,15.625 -11.575,15.65 -4.331,16.416 -2.713,16.416 -8.325,17.275 -6.975,17.3 2.455,17.405 3.5,17.405 4.545,17.405 -50,20 -30,20 30,20 50,20 2.455,20.595 3.5,20.595 4.545,20.595 -50,25 -35,25 35,25 50,25 1.2,27.28 12.7,27.28 -55,30 -50,30 -35,30 -30,30 -20,30 20,30 30,30 35,30 40,30 50,30 -4.169,31.889 -55,35 -50,35 -45,35 -40,35 -35,35 -30,35 -25,35 -20,35 -15,35 15,35 20,35 25,35 30,35 35,35 40,35 45,35 50,35 55,35 -55,40 -45,40 -40,40 -35,40 -30,40 -25,40 25,40 30,40 35,40 40,40 45,40 50,40 55,40 -50.032,40.159 -55,45 -45,45 -40,45 -35,45 -30,45 30,45 35,45 40,45 45,45 55,45 -40,50 -35,50 35,50 40,50 -45,55 -40,55 40,55 45,55
GPIO1: J5.1 U1.13 | length 43.8
  Top Layer w0.254: U1.13 -8.32,-10.43 -8,-10.75 v1(-4,-10.75)
  Bottom Layer w0.254: v1(-4,-10.75) -0.8,-10.75 15.45,5.5 24.5,5.5 J5.1
GPIO2: J5.2 U1.14 | length 44.5
  Top Layer w0.254: U1.14 -7.05,-9.801 -6.878,-9.973 v1(-4,-9.973)
  Bottom Layer w0.254: v1(-4,-9.973) -4.723,-9.973 -5.25,-10.5 -5.25,-11.25 -4.75,-11.75 0.2,-11.75 14.45,2.5 23.75,2.5 25.04,1.21 J5.2
GPIO3: J5.3 U1.24 | length 39.7
  Top Layer w0.254: U1.24 -2.465,4.445 0.25,1.73 6,1.73 10.73,-3 v1(13.5,-3)
  Bottom Layer w0.254: v1(13.5,-3) 12.624,-3 12.475,-2.851 12.475,-1.625 14.1,0 24.92,0 J5.3
GPIO4: J5.4 U1.25 | length 36
  Top Layer w0.254: U1.25 -2.465,5.715 0.25,3 6,3 11,-2 v1(13.5,-2)
  Bottom Layer w0.254: v1(13.5,-2) 14.75,-2 15.35,-2.6 24.98,-2.6 J5.4
INDICATION: D1.1 U1.16 | length 22.8
  Top Layer w0.254: v1(-7.485,-5.715) U1.16 ; v1(-0.8,-1.685) D1.1
  Bottom Layer w0.254: v1(-7.485,-5.715) -7.485,1.715 -4.884,4.316 -3.766,4.316 -0.8,1.35 v1(-0.8,-1.685)
IO0_BOOT: Q1.6 R60.2 TP5.1 U1.27 | length 89.5
  Top Layer w0.254: v1(-17.025,6.05) -8.45,6.05 -7.05,7.45 U1.27 ; TP5.1 U1.27 ; R60.2 -0.9,8.2 -1.45,8.75 U1.27 ; Q1.6 v1(16.45,19.375)
  Bottom Layer w0.254: v1(-17.025,6.05) -17.025,20.575 -15.219,22.381 -15.219,28.542 -10.61,33.151 -1.09,33.151 0.277,31.784 1.236,30.825 14.9,30.825 15.911,29.814 15.911,19.914 v1(16.45,19.375)
NetC1_1: C1.1 L1.1 U2.5 | length 6.5
  Top Layer w0.6: L1.1 6.225,12.7 6.929,13.404 8.204,13.404 8.7,13.9 8.725,13.9 C1.1
NetC1_2: C1.2 U2.6 | length 1.9
  Top Layer w0.6: U2.6 8.325,11.95 8.7,12.325 8.7,12.35 8.8,12.45 C1.2
NetD1_2: D1.2 R54.2 | length 1.7
  Top Layer w0.5: D1.2 R54.2
NetJ1_A5: J1.A5 R1.2 | length 6.3
  Top Layer w0.254: J1.A5 8.2,29.375 8.7,29.875 R1.2
NetJ1_B5: J1.B5 R2.2 | length 5.8
  Top Layer w0.254: R2.2 4.7,29.875 5.2,29.375 J1.B5
NetQ1_2: Q1.2 R53.1 | length 5
  Top Layer w0.254: Q1.2 17.1,15.325 17.5,14.925 18.925,14.925 19.275,15.275 R53.1
NetQ1_5: Q1.5 R52.1 | length 5.7
  Top Layer w0.254: R52.1 14.875,19.95 15.075,20.15 16.825,20.15 17.1,19.875 Q1.5
NetR3_2: R3.2 R9.1 R13.2 | length 3
  Top Layer w0.254: R9.1 -17.975,-18.225 R13.2 R3.2
NetR4_2: R4.2 R9.2 R10.1 | length 2.9
  Top Layer w0.254: R9.2 R10.1 -14.975,-18.225 R4.2
NetR5_2: R5.2 R10.2 R11.1 | length 2.9
  Top Layer w0.254: R5.2 -13.475,-18.225 R10.2 R11.1
NetR6_2: R6.2 R11.2 R12.1 | length 3.6
  Top Layer w0.254: R6.2 -11.95,-16.775 -10.773,-17.952 -10.723,-17.952 -10.45,-18.225 R11.2 R12.1
NetR16_2: R16.2 R22.1 R26.2 | length 3
  Top Layer w0.254: R22.1 5.525,-18.225 R26.2 R16.2
NetR17_2: R17.2 R22.2 R23.1 | length 2.9
  Top Layer w0.254: R22.2 R23.1 8.525,-18.225 R17.2
NetR18_2: R18.2 R23.2 R24.1 | length 2.9
  Top Layer w0.254: R18.2 10.025,-18.225 R23.2 R24.1
NetR19_2: R19.2 R24.2 R25.1 | length 3.6
  Top Layer w0.254: R19.2 11.55,-16.775 12.727,-17.952 12.777,-17.952 13.05,-18.225 R24.2 R25.1
NetR20_2: R20.2 R25.2 R46.1 | length 3.7
  Top Layer w0.254: R20.2 R46.1 14.798,-17.048 14.873,-17.048 16.05,-18.225 R25.2
NetR28_2: R28.2 R33.1 R37.2 | length 3
  Top Layer w0.254: R33.1 -6.25,-16.8 R37.2 R28.2
NetR29_2: R29.2 R33.2 R34.1 | length 2.9
  Top Layer w0.254: R33.2 R34.1 -3.225,-18.225 R29.2
NetR30_2: R30.2 R34.2 R35.1 | length 2.9
  Top Layer w0.254: R30.2 -1.7,-16.8 R34.2 R35.1
NetR31_2: R31.2 R35.2 R36.1 | length 3.6
  Top Layer w0.254: R31.2 -0.2,-16.775 0.977,-17.952 1.027,-17.952 1.3,-18.225 R35.2 R36.1
NetR51_2: R51.2 U4.9 | length 2
  Top Layer w0.254: U4.9 21.375,8.1 R51.2
NetTP1_1: TP1.1 U1.30 | length 1.9
  Top Layer w0.254: TP1.1 -10.865,8.755 U1.30
NetTP2_1: TP2.1 U1.29 | length 1.9
  Top Layer w0.254: TP2.1 -9.595,8.755 U1.29
NetTP3_1: TP3.1 U1.28 | length 1.9
  Top Layer w0.254: TP3.1 -8.325,8.755 U1.28
RTS: Q1.4 R53.2 U4.24 | length 8.1
  Top Layer w0.254: Q1.4 19.095,18.355 R53.2 21.55,18.175 22.875,16.85 U4.24
SD_CLK: J3.5 R45.2 U1.26 | length 26.8
  Top Layer w0.254: v1(-5.975,7.975) -5.975,7.16 U1.26 ; v1(-5.975,15.275) -5.975,18.299 -5.122,19.152 v1(-5.122,21.45) ; v1(-5.271,29.104) J3.5
  Bottom Layer w0.254: v1(-5.975,7.975) v1(-5.975,15.275) ; v1(-5.271,29.104) -5.325,29.05 -5.325,26.175 -5.122,25.972 v1(-5.122,21.45)
SD_CMD: J3.3 R40.2 U1.31 | length 26.4
  Top Layer w0.254: U1.31 v1(-12.13,10.475) ; v1(-9.2,17.275) -9.2,18.309 -8.357,19.152 v1(-8.357,21.45) ; v1(-7.471,29.104) J3.3
  Bottom Layer w0.254: v1(-12.13,10.475) -12.13,12.645 -9.2,15.575 v1(-9.2,17.275) ; v1(-8.357,21.45) -8.357,26.893 -7.471,27.779 v1(-7.471,29.104)
SD_DAT0: J3.7 R44.2 U1.32 | length 31.7
  Top Layer w0.254: U1.32 -13.4,10.475 -12.025,11.85 -8.775,11.85 -6.975,13.65 v1(-6.975,16.425) ; v1(-4.331,17.291) R44.2 -3.504,19.152 v1(-3.504,21.45) ; v1(-3.071,29.104) J3.7
  Bottom Layer w0.254: v1(-6.975,16.425) -6.25,16.425 -5.384,17.291 v1(-4.331,17.291) ; v1(-3.504,21.45) -3.504,28.564 -3.071,28.997 v1(-3.071,29.104)
SD_DAT1: J3.8 R43.2 U1.35 | length 37.4
  Top Layer w0.254: U1.35 -17.21,12.365 v1(-13.075,16.5) ; v1(-2.713,17.291) R43.2 -1.887,19.152 v1(-1.887,21.45) ; v1(-1.971,29.104) J3.8
  Bottom Layer w0.254: v1(-13.075,16.5) -11.509,16.5 -9.534,18.475 -3.897,18.475 v1(-2.713,17.291) ; v1(-1.971,29.104) -1.929,29.062 -1.929,21.492 v1(-1.887,21.45)
SD_DAT2: J3.1 R42.2 U1.34 | length 27
  Top Layer w0.254: U1.34 -15.94,11.56 -12.419,15.081 R42.2 ; R42.2@-12.394,18.325 -11.575,19.144 -11.575,21.15 -10.598,22.127 -10.598,28.529 -9.671,29.456 J3.1
SD_DAT3: J3.2 R41.2 U1.33 | length 27
  Top Layer w0.254: U1.33 -14.67,11.08 -10.777,14.973 -10.777,18.325 -9.95,19.152 v1(-9.95,21.45) ; v1(-8.571,29.104) J3.2
  Bottom Layer w0.254: v1(-9.95,21.45) -9.95,27.725 v1(-8.571,29.104)
SD_SW: J3.SW-A R39.2 U1.15 | length 38.7
  Top Layer w0.254: -15.001,21.525 -15.15,21.376 -15.15,19.45 R39.2@-14.025,18.325 ; -15,21.525 -14.119,22.406 J3.SW-A ; v1(-14.025,17.291) R39.2@-14.025,18.3 ; v1(-7.5,-7) -5.815,-7 U1.15 ; R39.2@-14.025,18.3 R39.2@-14.025,18.325 ; R39.2@-14.025,18.3 R39.2 R39.2@-14.025,18.325
  Bottom Layer w0.254: v1(-14.025,17.291) -14.025,-3.725 -10.75,-7 v1(-7.5,-7)
USB_D_N: J1.A7 J1.B7 U3.1 | length 7.5
  Top Layer w0.254: J1.A7 6.7,28.875 6.75,28.925 7.65,28.925 7.7,28.875 J1.B7 7.7,25.4 7.9,25.2 U3.1
USB_D_P: J1.A6 J1.B6 U3.3 | length 6.2
  Top Layer w0.254: U3.3 6,25.2 6.2,25.4 J1.B6 ; 6.322,26.475 7.025,26.475 7.2,26.65 J1.A6
VGA_B0: R28.1 U1.8 | length 14.4
  Top Layer w0.254: U1.8 -14.67,-10.53 -11.9,-13.3 -5.45,-13.3 -4.75,-14 -4.75,-15.2 R28.1
VGA_B1: R29.1 U1.9 | length 14.9
  Top Layer w0.254: U1.9 -13.4,-10.8 -11.5,-12.7 -4.3,-12.7 -3.225,-13.775 R29.1
VGA_B2: R30.1 U1.10 | length 15.5
  Top Layer w0.254: U1.10 -12.13,-10.933 -10.863,-12.2 -2.8,-12.2 -1.725,-13.275 R30.1
VGA_B3: R31.1 U1.11 | length 15.5
  Top Layer w0.254: U1.11 -10.86,-10.34 -9.715,-11.485 -1.765,-11.485 -0.225,-13.025 R31.1
VGA_B4: R32.1 U1.23 | length 28.1
  Top Layer w0.254: U1.23 v1(-4.075,3.175) ; R32.1 v1(1.275,-13.5)
  Bottom Layer w0.254: v1(-4.075,3.175) -6.5,0.75 -6.5,-12.1 -5.1,-13.5 v1(1.275,-13.5)
VGA_BLUE: J2.3 R32.2 R36.2 R38.1 | length 9.5
  Top Layer w0.254: J2.3 1.795,-19.25 3.275,-19.25 3.977,-18.548 4.027,-18.548 4.3,-18.275 4.3,-18.225 4.027,-17.952 4.002,-17.952 2.8,-16.75 R38.1 2.75,-16.775 R32.2
VGA_G0: R16.1 U1.17 | length 21.5
  Top Layer w0.254: U1.17 -4.805,-4.445 -4.615,-4.635 -4.615,-7.522 -2.337,-9.8 6,-9.8 7,-10.8 R16.1
VGA_G1: R17.1 U1.18 | length 24.1
  Top Layer w0.254: U1.18 -4.575,-3.175 -4.107,-3.643 -4.107,-6.193 -1.7,-8.6 7.5,-8.6 8.525,-9.625 R17.1
VGA_G2: R18.1 U1.19 | length 26.6
  Top Layer w0.254: U1.19 -4.345,-1.905 -3.599,-2.651 -3.599,-5.001 -1.1,-7.5 8.9,-7.5 10.025,-8.625 R18.1
VGA_G3: R19.1 U1.20 | length 29.1
  Top Layer w0.254: U1.20 -4.365,-0.635 -3.1,-1.9 -3.1,-3.825 -0.525,-6.4 10.5,-6.4 11.525,-7.425 R19.1
VGA_G4: R20.1 U1.21 | length 32
  Top Layer w0.254: U1.21 -3.435,0.635 -2.4,-0.4 -2.4,-2.9 -0.1,-5.2 11.7,-5.2 13.025,-6.525 R20.1
VGA_G5: R27.1 U1.22 | length 36.2
  Top Layer w0.254: U1.22 -2.905,1.905 -1.6,0.6 -1.6,-2 0.5,-4.1 14.7,-4.1 16.025,-5.425 R27.1
VGA_GREEN: J2.2 R27.2 R46.2 R47.2 | length 22.5
  Top Layer w0.254: J2.2 3.325,-20 16.75,-20 17.5,-19.25 17.5,-16.8 R47.2 R27.2 16,-16.775 15.727,-16.502 15.727,-16.402 14.55,-15.225 R46.2
VGA_HSYNC: J2.13 U1.39 | length 51.5
  Top Layer w0.254: U1.39 -22.29,-1.655 v1(-18.17,-5.775)
  Bottom Layer w0.254: v1(-18.17,-5.775) -18.17,-13.255 -7.475,-23.95 -7.475,-27.625 -6.025,-29.075 -2.95,-29.075 J2.13
VGA_R0: R3.1 U1.4 | length 7.8
  Top Layer w0.254: U1.4 -19.75,-11.141 -16.475,-14.416 R3.1
VGA_R1: R4.1 U1.5 | length 7.9
  Top Layer w0.254: U1.5 -18.48,-10.67 -14.975,-14.175 R4.1
VGA_R2: R5.1 U1.6 | length 8
  Top Layer w0.254: U1.6 -17.21,-10.665 -13.475,-14.4 R5.1
VGA_R3: R6.1 U1.7 | length 8.1
  Top Layer w0.254: U1.7 -15.94,-10.385 -11.975,-14.35 R6.1
VGA_R4: R7.1 U1.12 | length 6.8
  Top Layer w0.254: R7.1 v1(-10.475,-14.025) ; v1(-9.59,-10.475) U1.12
  Bottom Layer w0.254: v1(-10.475,-14.025) -10.475,-11.36 v1(-9.59,-10.475)
VGA_RED: J2.1 R7.2 R12.2 R14.1 | length 19.8
  Top Layer w0.254: R7.2 R14.1 -8.95,-16.775 -7.773,-17.952 -7.723,-17.952 -7.45,-18.225 R12.2 -7.45,-21.8 -6.65,-22.6 3.005,-22.6 J2.1
VGA_VSYNC: J2.14 U1.38 | length 46.5
  Top Layer w0.254: U1.38 -21.02,-1.655 v1(-16.9,-5.775)
  Bottom Layer w0.254: v1(-16.9,-5.775) -16.9,-12.6 -6.2,-23.3 -6.2,-26.975 -5.325,-27.85 -4.005,-27.85 J2.14
pads on no net: J1. J1.A8 J1.B8 J2.4 J2.11 J2.12 J2.15 U4.1 U4.2 U4.10 U4.11 U4.12 U4.13 U4.14 U4.15 U4.16 U4.17 U4.18 U4.19 U4.20 U4.21 U4.22 U4.23 U4.27

## Polygon pours and split planes (outlines as drawn)
GND on Top Layer "GND_L01_P011" (solid, remove dead copper, pour order 11): -62.771,58.775 60.175,58.775 60.175,-58.425 -60.473,-58.425
+5V on Top Layer "+5V_L01_P004" (solid, remove dead copper, pour order 4): 0.7,24.75 2.175,26.225 2.95,26.225 5.2,26.225 5.2,25.425 4.625,24.85 3.825,24.85 2.325,23.35 2.325,21.9 1.2,20.775 1.2,16.225 2.125,15.3 3.2,15.3 6.525,15.3 6.525,13.6 -0.1,13.6 -1.4,14.9 -1.4,20.425 0.7,22.525
+3V3 on Top Layer "+3V3_L01_P001" (solid, pour order 1): 18.375,8.95 19.225,8.95 19.225,11.275 18.375,11.275
+3V3 on Top Layer "+3V3_L01_P002" (solid, remove dead copper, pour order 2): 0.3,7.05 3.025,7.05 3.475,6.6 8.975,6.6 8.975,4.425 0.3,4.425 0.3,6.225
+3V3 on Top Layer "+3V3_L01_P008" (solid, remove dead copper, pour order 8): -26.35,-13 -22.95,-13 -22.75,-12.8 -22.75,-8 -21.75,-8 -21.75,-17.25 -26.35,-17.25
+3V3 on Bottom Layer "+3V3_L02_P007" (solid, remove dead copper, pour order 7): 17.45,12.6 17.45,8.025 18.6,6.875 20.55,6.875 21.365,6.05 21.365,-5.525 28.75,-5.525 28.75,9.25 17.75,20.25 17.75,30.75 14.5,34 -10.965,34 -14.5,30.465 -14.5,19.5 -3.535,19.5 -1.875,17.84 -1.875,5.875 0,4 2.9,4 2.9,6.3 0.3,8.9 0.3,27.8 2.15,29.65 12.85,29.65 13.625,28.875 13.625,16.425
GND on Bottom Layer "GND_L02_P010" (solid, remove dead copper, pour order 10): -65,65 65,65 65,-62.5 -62.5,-62.5
+3V3 on Bottom Layer "+3V3_L02_P009" (solid, remove dead copper, pour order 9): -26.675,-12.5 -26.675,-17.5 -21.5,-17.5 -21.5,-12.5

## Keep-outs
Keep-Out Layer:
  rectangle: -31,-9 -24.5,9

## Silkscreen, mask and mechanical layers (free items; w line width, h text height)
Top Overlay:
  drawing of 102 lines, arcs and shapes, not listed
  text "USB-C" at 15.766,28.051 h2 r90
  text "SD CARD" at -14.434,25.749 h2 r90
  text "+" at -0.946,20.937 h1
  text "IO0" at -6.602,11.864 h1.4 r90
  text "IO41" at -9.147,11.587 h1.4 r90
  text "IO42" at -10.417,11.516 h1.4 r90
  text "IO40" at -7.877,11.516 h1.4 r90
  text "ESP32-S3" at -29.876,11.109 h2
  text "IO19" at 28.995,2.412 h1.4 r60
  text "IO20" at 28.996,-0.126 h1.4 r60
  text "STATUS" at -1.775,-1.57 h1
  text "GPIO" at 17.116,-2.16 h2 r90
  text "IO47" at 28.994,-2.669 h1.4 r60
  text "IO48" at 28.994,-5.209 h1.4 r60
  text "IO" at 26.698,-7.306 h1.4 r90
  text "3V3" at 23.692,-8.248 h1.4 r90
  text "GND" at 20.698,-8.78 h1.4 r90
  text "VGA 16bit COLOR" at -7.656,-13.016 h2
  text "RST" at -20.019,-13.523 h1.4
Bottom Overlay:
  drawing of 173 lines, arcs and shapes, not listed
  text "JLCJLCJLCJLC" at -38,24.859 h1 r315
Top Solder:
  circle w4: c24.975,25 r3.5
  circle w4: c49.975,-50 r3.5
  circle w4: c24.975,-25 r3.5
  circle w4: c49.975,50 r3.5
  circle w4: c-50.025,50 r3.5
  circle w4: c-25.025,25 r3.5
  circle w4: c-25.025,-25 r3.5
  circle w4: c-50.025,-50 r3.5
Bottom Solder:
  circle w4: c49.975,-50 r3.5
  circle w4: c-50.025,-50 r3.5
  circle w4: c-50.025,50 r3.5
  circle w4: c49.975,50 r3.5
  circle w4: c24.975,-25 r3.5
  circle w4: c-25.025,-25 r3.5
  circle w4: c-25.025,25 r3.5
  circle w4: c24.975,25 r3.5
Mechanical 13:
  circle w0.254: c49.975,-50 r2.002
  circle w0.254: c24.975,-25 r2
  circle w0.254: c-25.025,-25 r2
  circle w0.254: c-50.025,-50 r2.01
  circle w0.254: c-50.025,50 r2
  circle w0.254: c49.975,50 r2
  circle w0.254: c-25.025,25 r2
  circle w0.254: c24.975,25 r2.01
  lines w0.2: -46.56,-25.739 -46.56,25.739 cw(c-39.673,25.739) -44.65,30.499 -35.817,21.666 cw(c-48.126,9.923) -31.114,9.923 -31.114,-9.929 ; -46.56,-25.723 ccw(c-39.673,-25.723) -44.65,-30.483 -35.817,-21.65 ccw(c-48.126,-9.907) -31.114,-9.907 ; 31.064,-9.929 31.064,9.923 cw(c48.076,9.923) 35.767,21.666 44.6,30.499 cw(c39.623,25.739) 46.51,25.739 ; 31.064,-9.907 ccw(c48.076,-9.907) 35.767,-21.65 44.6,-30.483 ccw(c39.623,-25.723) 46.51,-25.723 ; 46.51,-25.739 46.51,25.739 ; -59.328,-38.855 ccw(c-97.864,-20.365) -55.122,-20.365 -55.122,20.365 ccw(c-97.864,20.365) -59.328,38.855 cw(c-45.722,43.807) -35.484,54.045 -21.415,39.975 ccw(c-9.694,52.229) -9.694,35.272 9.644,35.272 ccw(c9.644,52.229) 21.365,39.975 35.434,54.045 cw(c45.672,43.807) 59.278,38.855 ccw(c97.814,20.365) 55.072,20.365 55.072,-20.365 ccw(c97.814,-20.365) 59.278,-38.855 cw(c45.672,-43.807) 35.434,-54.045 21.365,-39.975 ccw(c9.644,-52.229) 9.644,-35.272 -9.694,-35.272 ccw(c-9.694,-52.229) -21.415,-39.975 -35.484,-54.045 cw(c-45.722,-43.807) -59.328,-38.855

## Text inside footprints (layer, text, board x,y; h text height)
C9: Top Overlay "+" at -23.525,-13.85 h1